# Allegro board 8266-OLED-TIMER-V2.brd
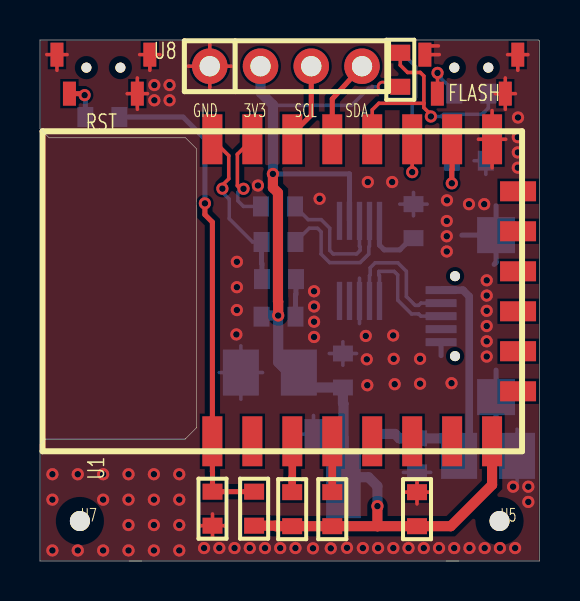
[diagram p0: board, top side]
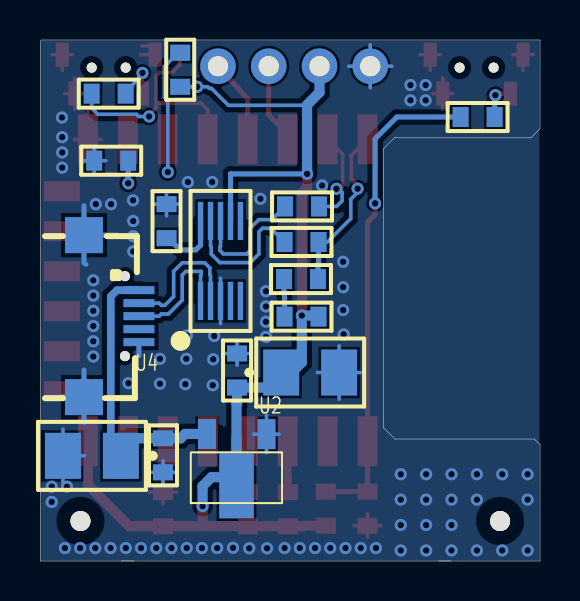
[diagram p1: board, bottom side, seen from below]

Outline 25 x 26.05 mm; copper layers: TOP, BOTTOM. Coordinates in mm from the lower left corner of the outline.
Outline path: 4.45,0 20.95,0 ; 5.08,0 0,0 0,5.82 0.28,6.1 7.26,6.1 7.82,6.65 7.82,20.62 7.29,21.16 0.46,21.16 0,21.62 0,26.05 24.95,26.05 25,26 25,0 20.32,0

## Design rules (mm)
net group DIFFPAIR0: nets RXD0 TXD0
net group DIFFPAIR1: nets DN DP
net group DIFFPAIR2: nets N123931 N124799
net group DIFFPAIR3: nets SCL SDA

## Placement (name value [footprint] x y rotation side)
C1  100uF  [SMDC3528]  11.51 9.42 180 bottom
C2  100uF  [SMDC3528]  22.43 5.26 0 bottom
C3  100nF  [SMD0603]  8.64 2.62 270 top
C4  0.1u  [SMD0603]  18.87 5.28 270 bottom
C5  0.1u  [SMD0603]  15.16 9.53 90 bottom
C6  0.1uF  [SMD0603]  18.87 2.59 270 top
C7  0.1uF  [SMD0603]  18.69 16.99 270 bottom
D1  LED  [SMD0603]  11.96 14.1 0 bottom
FLASH  KEY  [2_4_3P5_KEY]  21.59 23.37 0 top
R1  12K  [SMD0603]  18.03 24.56 90 top
R2  12K  [SMD0603]  18.01 24.56 90 bottom
R3  12K  [SMD0603]  12.62 2.59 90 top
R4  12K  [SMD0603]  10.72 2.62 90 top
R5  470  [SMD0603]  14.63 2.59 90 top
R6  12K  [SMD0603]  21.46 20.02 0 bottom
R7  470  [SMD0603]  3.12 22.2 180 bottom
R8  470  [SMD0603]  21.59 23.37 180 bottom
R9  100  [SMD0603]  11.91 17.73 0 bottom
R10  100  [SMD0603]  11.94 15.95 0 bottom
R12  470  [SMD0603]  11.94 12.22 180 bottom
RST  KEY  [2_4_3P5_KEY]  3.17 23.37 0 top
U1  ESP8266  [8266]  24.13 5.49 90 top
U2  LM1117F-3.3  [SOT89]  13.69 5.84 270 bottom
U3  CH340B  [CIS_MSOP10_01]  16.99 13 90 bottom
U4  7PIN  [MICROUSB]  22.28 12.24 270 bottom
U5  1PIN  [HOLE_2MM]  23 2 0 top
U7  1PIN  [HOLE_2MM]  2 2 0 top
U8  4PIN  [SIP4]  8.5 24.74 0 top

## Library data of the parts
C1 C2 = CAP
C3-C7 = CAP NP
D1 = LED
FLASH RST = KEY_1
R1-R10 R12 = R
U1 = 8266_0
U2 = lm1117f-3_0.3
U3 = CH340B_0
U4 = 7PIN
U5 U7 = 1PIN
U8 = 4PIN

## Footprints (pads in the part's own frame, mm; a bottom-side part is the same pattern mirrored in y, then rotated)
2_4_3P5_KEY
  round 0.5 hole 0.749 unplated: (-0.851,1.3) (0.851,1.3)
  rect 0.65x1.199 smd: 1(-1.699,0) 2(1.699,0) 3(-2.324,1.951) 4(2.324,1.951)
8266
  rect 2.499x1.001 smd: 1(0.5,15.499) 2(0.5,13.5) 3(0.5,11.501) 4(0.5,9.5) 5(0.5,7.501) 6(0.5,5.499) 7(0.5,3.5) 8(0.5,1.501) 15(15.601,1.501) 16(15.601,3.5) 17(15.601,5.499) 18(15.601,7.501) 19(15.601,9.5) 20(15.601,11.501) 21(15.601,13.5) 22(15.601,15.499)
  rect 1.001x1.801 smd: 9(3,0.201) 10(5.001,0.201) 11(7,0.201) 12(8.999,0.201) 13(11.001,0.201) 14(13,0.201)
CIS_MSOP10_01
  rect 1.905x0.269 smd: 1(0,0) 2(0,-0.5) 3(0,-1.001) 4(0,-1.501) 5(0,-1.999) 6(4,-1.999) 7(4,-1.501) 8(4,-1.001) 9(4,-0.5) 10(4,0)
HOLE_2MM
  round 1.001 hole 1.999 unplated: (0,0)
MICROUSB
  round 0.5 hole 0.5 unplated: (-1.999,1.501) (1.999,1.501)
  rect 0.399x1.549 smd: 1(-1.3,2.2) 2(-0.65,2.2) 3(0,2.2) 4(0.65,2.2) 5(1.3,2.2)
  rect 1.801x1.9 smd: 6(-4.049,-0.551) 7(4.049,-0.551)
SIP4
  round 1.778 hole 1.016: 1(0,0) 2(2.54,0) 3(5.08,0) 4(7.62,0)
SMD0603
  rect 0.8x1.001 smd: 1(-0.851,0) 2(0.851,0)
SMDC3528
  rect 1.801x2.301 smd: 1(-1.45,0) 2(1.45,0)
SOT89
  rect 1.501x0.899 smd: 1(-0.5,0) 3(-0.511,-2.979)
  custom 4.115x1.727 smd: 2(1.651,-1.501)

## Nets
3V3: C1.1 C5.1 C6.2 R1.1 R2.1 R3.1 R4.1 R5.1 R12.2 U1.8(VDD) U2.2(OUT) U3.7(VCC) U8.2
5V: C2.1 C4.1 U2.3(IN) U4.1
0: C1.2 C2.2 C3.2 C4.2 C5.2 C6.1 C7.1 FLASH.2 FLASH.3 FLASH.4 R6.2 RST.2 RST.3 RST.4 U1.15(GND) U2.1(GND) U3.3(GND) U4.5 U4.6 U4.7 U8.1
DN: U3.2(UD-) U4.2
DP: U3.1(UD+) U4.3
EN: R3.2 U1.3(EN)
GPIO0: R1.2 R8.1 U1.18(GPIO0)
GPIO2: R2.2 U1.17(GPIO2)
GPIO15: R6.1 U1.16(GPIO15)
NRST: C3.1 R4.2 R7.1 U1.1(RST)
RXD0: R9.1 U1.21(RXD0)
SCL: U1.20(GPIO5) U8.3
SDA: U1.19(GPIO4) U8.4
TXD0: D1.1(CATHODE) R10.1 U1.22(TXD0)
N95282: R5.2 U1.4(GPIO16)
N113670: R7.2 RST.1
N114045: FLASH.1 R8.2
N123495: C7.2 U3.10(V3)
N123931: R9.2 U3.8(TXD)
N124799: R10.2 U3.9(RXD)
N128009: D1.2(ANODE) R12.1

Pads without a net: U1 2 5 6 7 9 10 11 12 13 14; U3 4 5 6; U4 4

## Via types
v1: diameter 0.61, hole 0.33, TOP to BOTTOM, 97 vias

## Routing (per net, layer and track width the routed paths; a pad name or vN(x,y) marks a point on that pad's centre or on a via; arc(x,y) is an arc through that point)
3V3: length 57.1
  TOP w0.178: R1.1 v1(17.16,23.71)
  TOP w0.508: 16.89,1.74 R5.1 R3.1 11.8,1.74 11.78,1.77 R4.1 ; 16.89,1.74 v1(16.89,2.74) ; 16.89,1.74 C6.2 20.56,1.74 22.63,3.81 U1.8 ; v1(11.66,19.35) 11.66,18.66 11.91,18.41 11.91,12.97 11.92,12.96 v1(11.92,12.27)
  BOTTOM w0.178: R2.1 v1(17.16,23.71) 16.63,23.71 16.56,23.63 16.44,23.63 15.6,22.78 11.68,22.78 11.66,22.81
  BOTTOM w0.254: U3.7 15.49,19.35 15.49,19.35 v1(11.66,19.35)
  BOTTOM w0.508: v1(16.89,2.74) 16.89,3.74 16.44,4.19 U2.2 15.19,7.86 15.16,7.89 C5.1 13.47,8.67 12.96,9.18 C1.1 12.43,9.42 11.92,9.93 v1(11.92,12.27) 11.14,12.27 R12.2 ; U8.2 11.04,23.43 11.66,22.81 v1(11.66,19.35)
5V: length 14.4
  BOTTOM w0.381: 20.93,5.69 21.1,5.69 21.48,6.07 21.48,13.23 21.17,13.54 U4.1
  BOTTOM w0.508: U2.3 17.77,6.35 17.99,6.13 C4.1 20.49,6.13 20.93,5.69 20.93,5.31 C2.1
0: length 63.5
  TOP w0.178: U8.1 8.5,25.81 ; U8.1 7.43,24.74 ; U8.1 9.57,24.74 ; U8.1 8.5,23.67 ; FLASH.4 24.42,25.32 ; FLASH.4 23.91,24.54 ; FLASH.4 23.41,25.32 ; 22.78,23.37 FLASH.2 ; FLASH.2 23.29,24.15 ; FLASH.2 23.29,22.59 ; FLASH.2 23.8,23.37 ; C6.1 19.56,3.44 ; C6.1 18.19,3.44 ; C6.1 18.87,4.03 ; C6.1 18.87,2.86 ; 4.37,23.37 RST.2 ; RST.2 4.87,24.15 ; RST.2 4.87,22.59 ; RST.2 5.38,23.37 ; C3.2 8.64,2.35 ; C3.2 9.32,1.77 ; C3.2 7.95,1.77 ; C3.2 8.64,1.18 ; 0.34,25.32 RST.3 ; RST.3 1.36,25.32 ; RST.3 0.85,24.54 ; 19.98,25.32 FLASH.3 19.27,25.57 19.46,25.76 19.94,25.76 ; 5.5,24.54 RST.4 ; RST.4 4.99,25.32 ; RST.4 6.01,25.32 ; 22.63,19.65 U1.15 ; U1.15 21.95,21.09 ; U1.15 22.63,22.52 ; U1.15 23.31,21.09
  BOTTOM w0.178: 15.99,11.87 U3.3 15.99,14.14 ; 21.73,20.02 R6.2 ; R6.2 22.9,20.02 ; R6.2 22.31,20.7 ; R6.2 22.31,19.33 ; 15.16,9.79 C5.2 ; C5.2 15.16,10.96 ; C5.2 14.48,10.38 ; C5.2 15.85,10.38 ; U8.1 9.57,24.74 ; U8.1 7.43,24.74 ; U8.1 8.5,25.81 ; U8.1 8.5,23.67 ; 18.87,3.85 C4.2 ; C4.2 18.87,5.02 ; C4.2 19.56,4.43 ; C4.2 18.19,4.43 ; U2.1 14.32,6.34 ; U2.1 13.69,7.28 ; U2.1 13.06,6.34 ; U2.1 13.69,5.41 ; C7.1 19.38,17.84 ; C7.1 18.69,17.26 ; C7.1 18.69,18.43 ; C7.1 18.01,17.84 ; C1.2 10.06,10.76 ; C1.2 10.06,8.09 ; C1.2 11.14,9.42 ; C1.2 8.97,9.42 ; C2.2 23.88,6.59 ; C2.2 22.79,5.26 ; C2.2 23.88,3.92
  BOTTOM w0.254: U4.6 22.83,17.76 ; U4.6 21.12,16.29 ; U4.6 22.83,14.93 22.73,14.83 ; U4.5 20.08,10.27 ; U4.7 22.83,6.93 ; U4.7 22.83,9.54 ; U4.7 24.04,8.19
  vias: v1(0.62,4.34) v1(0.62,3.07) v1(0.62,0.53) v1(1.89,4.34) v1(1.89,0.53) v1(3.16,4.34) v1(3.16,3.07) v1(3.16,0.53) v1(4.43,4.34) v1(4.43,3.07) v1(4.43,1.8) v1(4.43,0.53) v1(5.73,23.8) v1(5.73,23.04) v1(5.7,4.34) v1(5.7,3.07) v1(5.7,1.8) v1(5.7,0.53) v1(6.49,23.8) v1(6.49,23.04) v1(6.97,4.34) v1(6.97,3.07) v1(6.97,1.8) v1(6.97,0.53) v1(8.21,0.65) v1(8.98,0.65) v1(9.74,0.65) v1(9.83,11.33) v1(9.86,14.96) v1(9.86,13.69) v1(9.86,12.55) v1(10.5,0.65) v1(10.91,18.78) v1(11.26,0.65) v1(12.02,0.65) v1(12.79,0.65) v1(13.72,13.49) v1(13.72,12.73) v1(13.72,11.96) v1(13.72,11.2) v1(13.67,0.64) v1(14,18.11) v1(14.55,0.64) v1(15.37,0.66) v1(16.16,0.65) v1(16.31,11.25) v1(16.41,18.95) v1(16.36,10.08) v1(16.38,8.79) v1(16.92,0.65) v1(17.63,18.95) v1(17.68,11.28) v1(17.7,10.11) v1(17.69,0.65) v1(17.75,8.84) v1(18.45,0.65) v1(19.02,10.11) v1(19.02,8.86) v1(19.21,0.65) v1(19.97,0.65) v1(20.37,18.03) v1(20.36,17) v1(20.36,16.24) v1(20.36,15.48) v1(20.6,8.89) v1(20.73,0.65) v1(21.47,17.84) v1(21.5,0.65) v1(22.24,17.84) v1(22.26,0.65) v1(22.36,14.03) v1(22.36,13.27) v1(22.36,12.51) v1(22.36,11.75) v1(22.36,10.99) v1(22.36,10.22) v1(23.02,0.65) v1(23.68,3.72) v1(23.78,0.65) v1(23.93,22.17) v1(23.92,21.19) v1(23.92,20.43) v1(23.92,19.67) v1(24.44,3.72) v1(24.44,2.95)
DN: length 7
  BOTTOM w0.178: U4.2 19.07,12.89 18.96,12.78 18.78,12.78 18.34,13.22 18.34,14.48 17.91,14.91 16.78,14.91 16.53,14.66 16.53,14.3 16.49,14.27 U3.2
DP: length 6.3
  BOTTOM w0.178: U4.3 19.07,12.24 18.96,12.35 18.6,12.35 17.91,13.04 17.91,14.3 17.73,14.48 16.96,14.48 16.96,14.3 16.99,14.27 U3.1
EN: length 2.5
  TOP w0.381: U1.3 12.63,4.17 12.62,4.16 R3.2
GPIO0: length 12.3
  TOP w0.178: U1.18 16.63,22.56 16.96,22.89 19.22,22.89 ; 19.22,22.89 19.22,22.67 19.42,22.46 19.42,22.37 ; 19.22,22.89 19.22,24.25 19.03,24.43 18.4,24.43 18.03,24.79 R1.2 ; 19.56,22.23 19.56,22.24 19.42,22.37 ; 19.56,22.23 19.42,22.37 19.42,22.37 ; 19.56,22.23 v1(19.57,22.23)
  BOTTOM w0.178: v1(19.57,22.23) 20.09,22.23 20.2,22.33 22.13,22.33 22.44,22.65 R8.1
GPIO2: length 8.1
  TOP w0.178: U1.17 v1(18.63,19.44)
  BOTTOM w0.178: R2.2 18.11,25.41 18.8,24.72 18.8,23.19 18.63,23.02 v1(18.63,19.44)
GPIO15: length 3.3
  TOP w0.254: U1.16 20.63,19.58 20.61,19.56 v1(20.61,18.88)
  BOTTOM w0.254: R6.1 v1(20.61,18.88)
NRST: length 24.6
  TOP w0.254: v1(8.26,17.88) 8.26,17.32 8.63,16.94 U1.1 8.63,4.48 8.64,4.47 C3.1 R4.2
  BOTTOM w0.254: v1(8.26,17.88) 8.26,21.11 7.16,22.2 R7.1
RXD0: length 5.1
  TOP w0.178: v1(10.19,18.61) 10.18,18.62 10.03,18.62 9.88,18.76 9.88,20.34 U1.21
  BOTTOM w0.178: R9.1 10.19,17.73 9.91,18.01 9.91,18.43 10.08,18.61 v1(10.19,18.61)
SCL: length 4
  TOP w0.254: U1.20 12.63,21.35 13.58,22.3 U8.3
SDA: length 4.2
  TOP w0.254: U8.4 14.63,23.1 U1.19
TXD0: length 8.5
  TOP w0.178: U1.22 9.45,20.27 9.45,19.11 9.13,18.79 v1(9.13,18.62)
  BOTTOM w0.178: v1(9.13,18.62) 9.13,18.43 9.47,18.09 9.47,17.12 10.64,15.95 R10.1
  BOTTOM w0.254: D1.1 11.11,14.86 11.09,14.88 R10.1
N95282: length 2.5
  TOP w0.381: U1.4 R5.2
N113670: length 1.9
  TOP w0.254: v1(2.24,23.29) 2.16,23.37 RST.1
  BOTTOM w0.254: v1(2.24,23.29) 2.27,23.25 R7.2
N114045: length 2.4
  TOP w0.178: FLASH.1 19.9,23.38 v1(19.9,24.4)
  BOTTOM w0.178: R8.2 20.74,23.47 20.07,24.13 20.07,24.25 19.92,24.4 v1(19.9,24.4)
N123495: length 3.3
  BOTTOM w0.254: U3.10 16.99,15.79 17.23,15.55 18.01,15.55 18.6,16.14 C7.2
N123931: length 6.5
  BOTTOM w0.178: U3.8 15.99,15.74 16.02,15.71 16.02,15.53 15.85,15.35 14.68,15.35 14.5,15.53 14.5,16.64 14.07,17.07 13.42,17.07 R9.2
N124799: length 7.2
  BOTTOM w0.178: U3.9 16.49,15.74 16.46,15.71 16.46,15.35 16.03,14.92 14.5,14.92 14.07,15.35 14.07,16.46 13.89,16.64 13.47,16.64 R10.2
N128009: length 1.9
  BOTTOM w0.254: D1.2 12.81,13.34 12.79,13.31 R12.1

## Copper pours and planes (outline as drawn; the poured copper is in the pictures)
0 on TOP: 0.04,0.04 0.04,26.01 24.94,26.01 24.97,25.98 24.97,0.04
0 on BOTTOM: 0.04,0.04 0.04,26.01 24.94,26.01 24.97,25.98 24.97,0.04 ; 1 cut-out

## Text on the board
Ref Des/Silkscreen Top: GND | 3V3 | SCL | SDA | bilibili | UID: | 177810096
